# Altium PCB imx6_base_board_lcd7_r1.PcbDoc (part 3 of 6)
Units mil, origin at the board's own origin, x right, y up, seen from the top; angles counter-clockwise.
Board outline 7480.32 x 5118.11 mil, 4 copper layers (Top Layer, Internal Plane 1, Internal Plane 2, Bottom Layer), stack 30.635 mil thick; 518 components, 398 nets, 1886 pads, 1407 vias.
Unrouted connection lines stored in the file: 12.
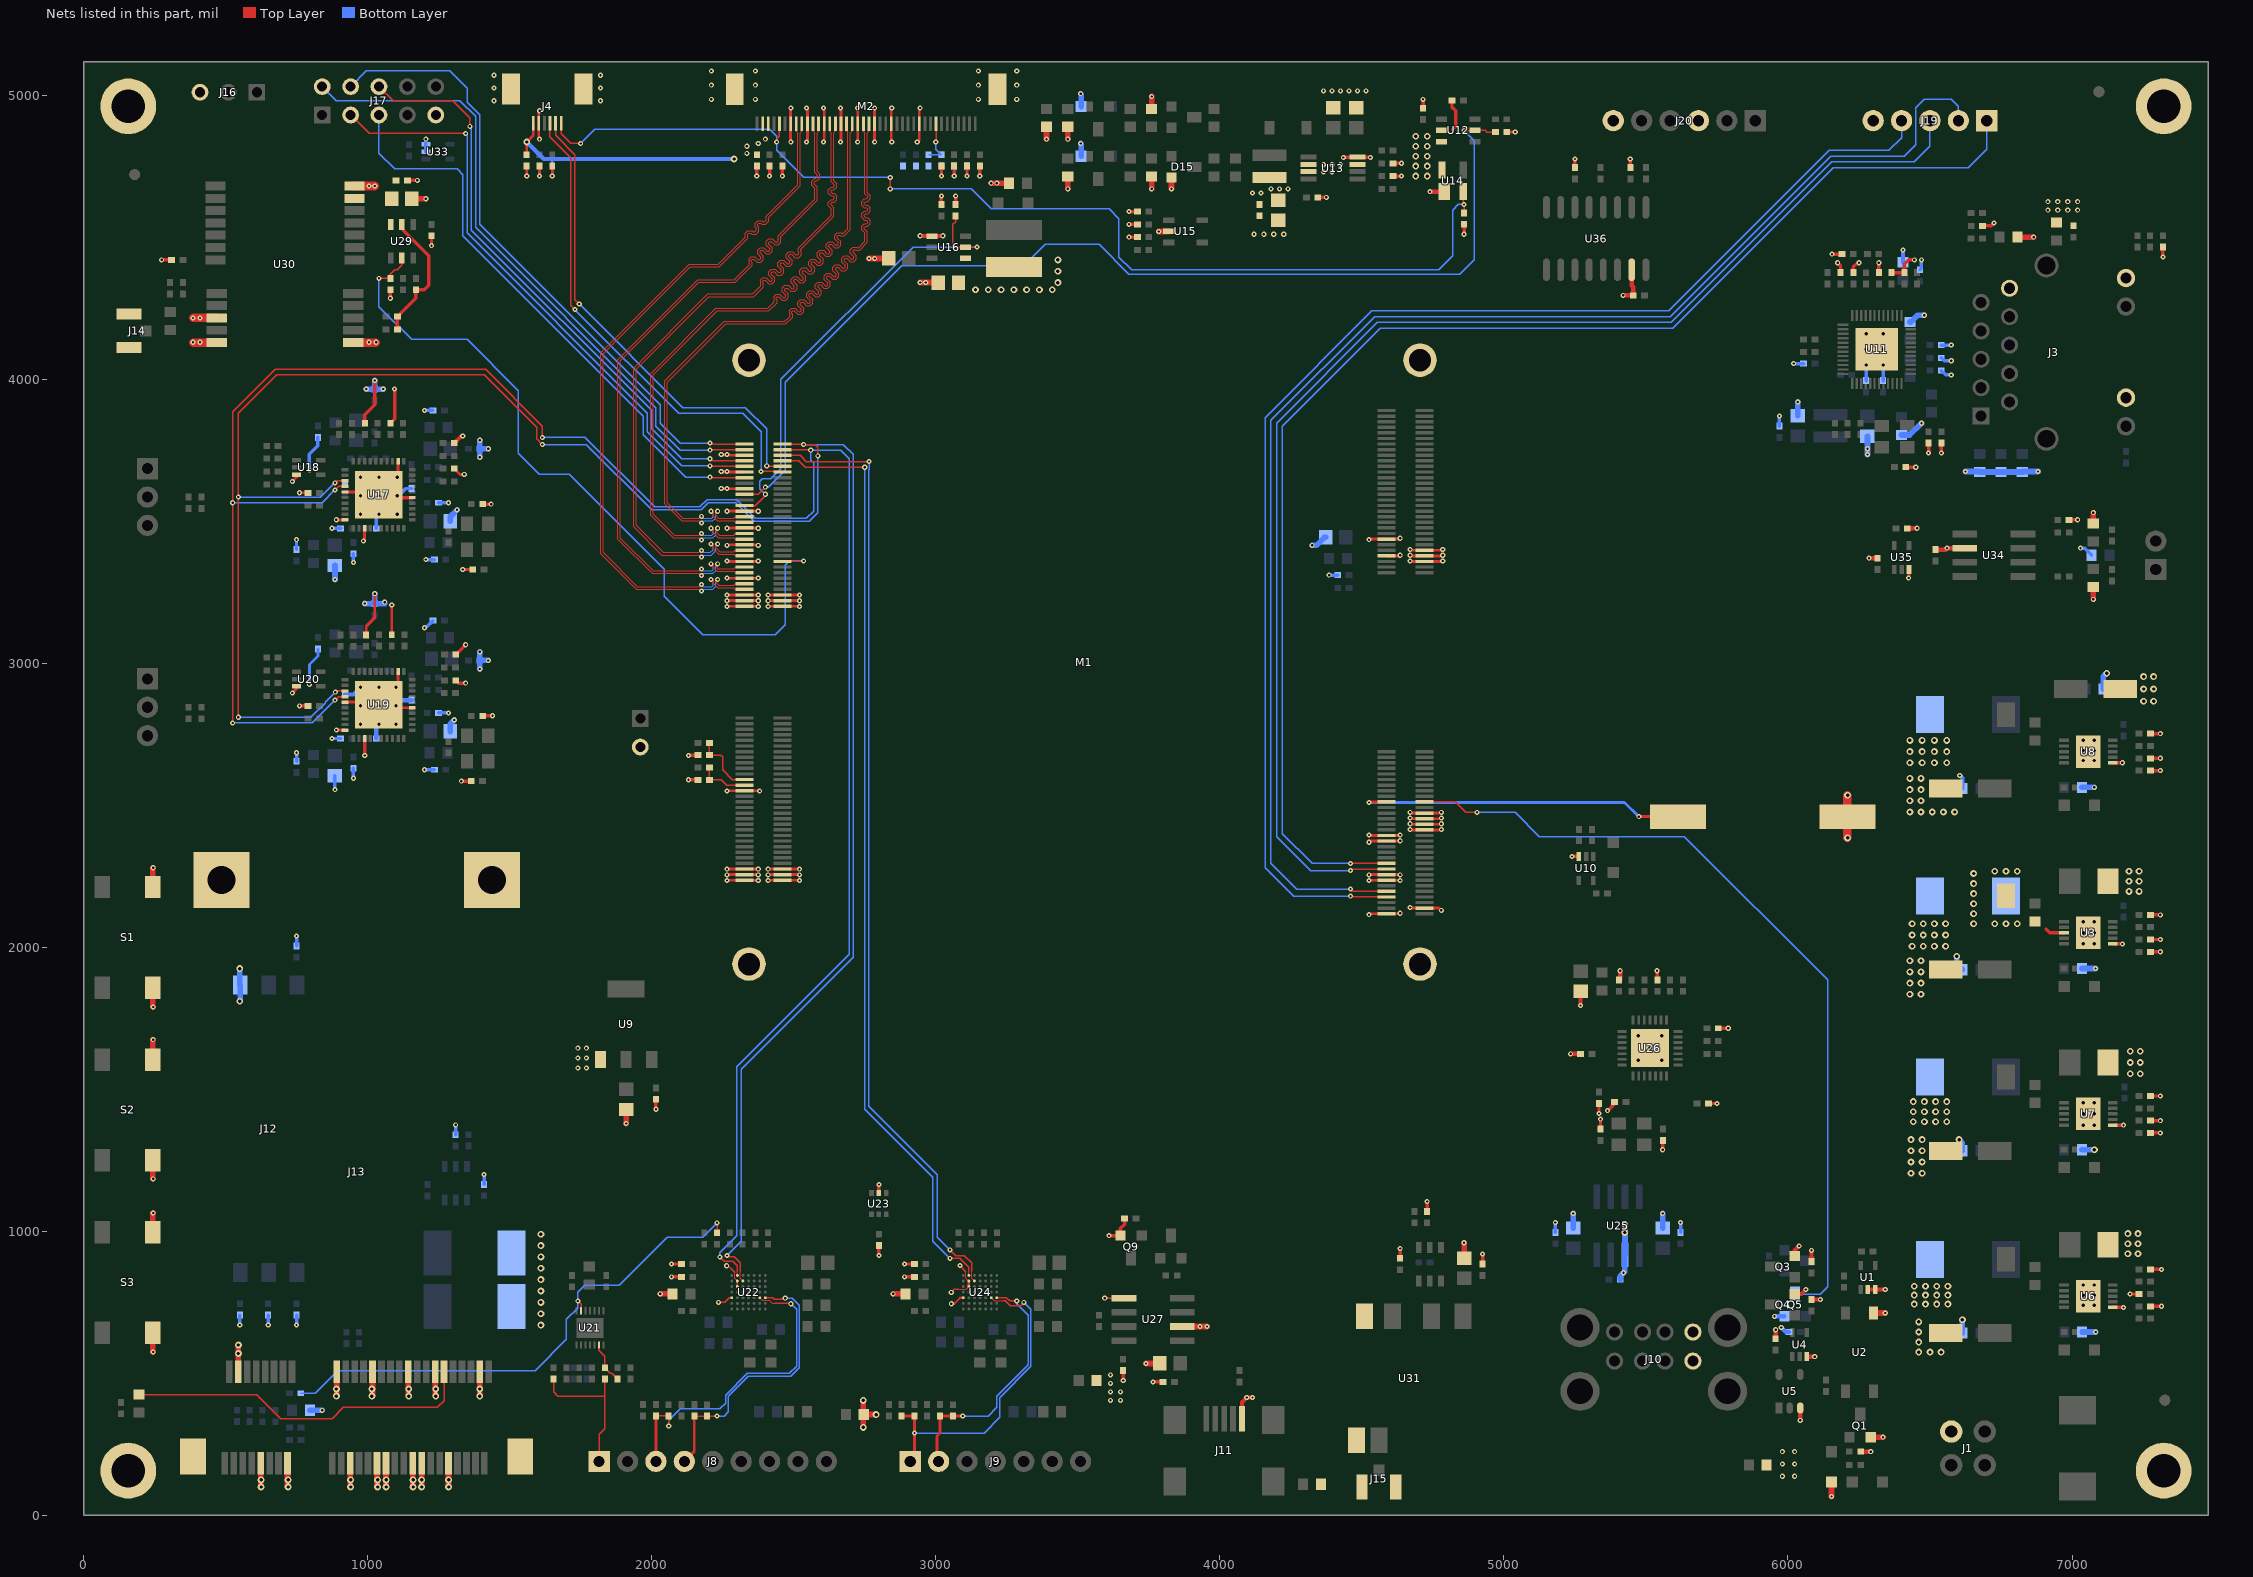
[diagram p5: the nets of this part, all layers, seen from the top]

## Via types
v1: diameter 18, hole 8, Top Layer to Bottom Layer, tented both sides, 875 vias
v2: diameter 24, hole 12, Top Layer to Bottom Layer, tented both sides, 532 vias

## Nets (pads, with @x,y where several pads share a name; then routed paths per layer and width w, separated by ;. In a path a pad name is that pad's centre, name@x,y a point inside that pad or via, vN(x,y) a via of type N, cw(c..) or ccw(c..) an arc to the next point about the centre after c; other vN are vias at no path point) (continued)
GND: BT1.2 C1.2 C2.2 C4.2 C5.2 C6.2 C7.2 C8.2 C10.2 C11.2 C12.2 C13.2 C14.2 C16.2 C17.2 C18.2 C20.2 C21.2 C22.2 C23.2 C24.2 C25.2 C26.2 C27.2 C28.2 C29.2 C30.2 C31.2 C32.2 C33.2 C34.2 C35.2 C36.2 C37.2 C38.2 C39.2 C40.2 C41.2 C42.2 C43.2 C44.1 C45.2 C46.2 C48.1 C49.2 C50.2 C51.2 C52.2 C55.2 C56.2 C57.2 C58.2 C59.2 C60.2 C61.2 C62.2 C63.2 C64.2 C65.2 C66.2 C67.2 C68.2 C69.2 C70.2 C71.2 C72.2 C77.2 C78.2 C79.2 C83.1 C85.1 C86.1 C87.2 C92.1 C93.1 C94.1 C95.1 C96.1 C97.1 C98.2 C99.2 C100.2 C101.2 C102.2 C107.2 C108.2 C109.2 C113.1 C115.1 C116.1 C117.2 C122.1 C123.1 C124.1 C125.1 C126.1 C127.1 C134.1 C138.1 C141.1 C147.2 C150.1 C154.1 C157.1 C162.1 C163.1 C164.1 C165.1 C166.1 C167.2 C168.2 C169.2 C170.2 C171.2 C172.2 C173.2 C174.1 C175.1 C176.2 C177.2 C179.2 C180.2 C181.2 C182.2 C183.2 C184.2 C186.2 C188.2 C189.2 C191.2 C192.2 C193.1 C194.2 C195.2 C196.2 C197.2 C198.2 C199.2 C201.2 C202.2 D3.1 D4.1 D7.1 D9.1 D11.1 D13.2 D15.2 D16.1 D17.2 J1.4 J2.2 J3.10 J3.12 J3.14 J4. J4.5 J10.4 J10.8 J11.5 J12.4 J13.0 J13.4 J13.9 J13.15 J13.18 J13.21 J13.26 J13.27 J13.29 J13.34 J13.35 J13.37 J13.40 J13.43 J13.50 J13.MT9 J13.MT10 J14.2 J14.3 J15.2 J15.3 J16.3 J17.9 J19.5 J20.3 J20.6 L19.1 L21.1 L23.1 L25.1 M1.A5 M1.A11 M1.A17 M1.A25 M1.A31 M1.A37 M1.A43 M1.A49 M1.A55 M1.A56 M1.A57 M1.A58 M1.A59 M1.A60 M1.B27 M1.B55 M1.B56 M1.B57 M1.B58 M1.B59 M1.B60 M1.C47 M1.C52 M1.C53 M1.C54 M1.C56 M1.D24 M1.D26 M1.D28 M1.D30 M1.D31 M1.D33 M1.D45 M1.D47 M1.D58 M1.D59 M1.MT5 M1.MT6 M1.MT7 M1.MT8 M2. M2.7 M2.10 M2.13 M2.16 M2.19 M2.22 M2.25 M2.30 pad.MT1 pad.MT2 pad.MT3 pad.MT4 Q1.3 Q3.3 Q4.3 Q5.3 Q9.3 R7.2 R9.2 R10.1 R12.2 R13.2 R14.2 R16.2 R19.2 R20.1 R24.2 R26.1 R29.2 R30.1 R43.2 R46.1 R51.1 R52.1 R53.1 R54.1 R55.1 R56.1 R57.1 R58.1 R62.1 R64.1 R69.2 R70.2 R71.2 R72.2 R74.1 R76.1 R78.1 R80.1 R83.1 R85.2 R86.1 R90.2 R98.2 R99.2 R103.2 R111.2 R112.2 R143.2 R150.1 R152.2 R154.1 R157.1 R159.1 R160.1 R172.1 R175.1 R177.1 R179.1 R180.1 R186.2 R188.2 R190.2 S1.1 S2.1 S3.1 U1.2 U1.3 U2.3 U3.6 U3.11 U4.3 U5.3 U6.6 U6.11 U7.6 U7.11 U8.6 U8.11 U9.1 U10.3 U11.49 U13.4 U14.1 U15.2 U16.4 U17. U17.3 U17.15 U17.22 U17.35 U17.40 U18.3 U19. U19.3 U19.15 U19.22 U19.35 U19.40 U20.3 U22.F2 U22.F3 U22.G5 U23.2 U24.F2 U24.F3 U24.G5 U25.6 U26.29 U27.1 U27.6 U30.10 U30.12 U30.13 U30.24 U31.4 U31.6 U33.2 U33.3 U34.2 U35.3 U36.15 | length 18322.1
  Top Layer w3: 2292,855 2292.07,854.93 2292.07,834.93 2294,833 2294,832.88 U22.F2@2301.57,825.31 ; 3080.79,795.78 3106.72,795.78 U24.F3@3116.57,805.63 ; 3106.38,858.62 3106.38,835.5 U24.F2@3116.57,825.31
  Top Layer w4.7: v1(2235,750) 2257,750 2273.25,766.25 U22.G5@2281.88,766.25 ; v1(2264,879) 2268,879 2283,864 2284,864 2292,856 2292,855 ; U22.F3@2301.57,805.63 U22.F2@2301.57,825.31 ; v1(3054.77,785.23) 3055.23,785.23 3065.79,795.78 3080.79,795.78 ; v1(3085,880) 3106.38,858.62 ; v1(3595,765) U27.1@3662.64,765
  Top Layer w8: v1(3055,745) 3065,745 3086.25,766.25 U24.G5@3096.88,766.25 ; U24.F3@3116.57,805.63 U24.F2@3116.57,825.31
  Top Layer w10: v1(735,2895) 750,2910 U20.3@750,2918.8 ; v1(735,3640) 750,3655 U18.3@750,3663.8 ; v1(760,3600) R90.2@790.13,3600 ; v1(890,2765) 890.47,2764.53 U19.40@920.47,2764.53 ; v1(890,3505) 890.47,3504.53 U17.40@920.47,3504.53 ; U19.35@920.47,2862.95 1028.74,2862.95 U19.@1038.58,2853.11 ; U17.35@920.47,3602.95 1028.74,3602.95 U17.@1038.58,3593.11 1107.48,3662.01 U17.22@1107.48,3711.22 ; v1(985,3430) 989.37,3434.37 U17.3@989.37,3475 ; C117.2@995,3099.87 995,3130 1025,3160 v1(1025,3245) ; C115.1@1085,3100.13 v1(1085,3205) ; U19.@1100.24,2914.76 U19.@1038.58,2853.11 ; U19.@1107.48,2922.01 U19.22@1107.48,2971.22 ; U19.15@1156.69,2844 U19.15@1156.69,2843.27 1048.43,2843.27 U19.@1038.58,2853.11 ; C86.1@1305.13,3685 1325.13,3665 v1(1340,3665) ; v1(1560,4715) C67.2@1560,4750.13 ; v1(1605,4715) R85.2@1605,4750.13 ; v1(1605,4845) 1602.6,4842.6 J4.5@1602.6,4900.28 1602.6,4942.6 v1(1605,4945) ; v1(2245,3615) 2245.83,3614.17 M1.A17@2326.77,3614.17 ; v1(2245,3675) 2246.77,3673.23 M1.A11@2326.77,3673.23 ; v1(2245,3735) 2247.72,3732.28 M1.A5@2326.77,3732.28 ; v1(2265,2235) 2266.22,2236.22 M1.B59@2326.77,2236.22 2373.78,2236.22 v1(2375,2235) ; v1(2265,2255) 2265.91,2255.91 M1.B57@2326.77,2255.91 2374.09,2255.91 v1(2375,2255) ; v1(2265,2275) 2265.59,2275.59 M1.B55@2326.77,2275.59 2374.41,2275.59 v1(2375,2275) ; v1(2265,2550) 2266.18,2551.18 M1.B27@2326.77,2551.18 2378.82,2551.18 v1(2380,2550) ; v1(2265,3200) 2265.79,3200.79 M1.A59@2326.77,3200.79 2374.21,3200.79 v1(2375,3200) ; v1(2265,3220) 2265.47,3220.47 M1.A57@2326.77,3220.47 2374.53,3220.47 v1(2375,3220) ; v1(2265,3240) 2265.16,3240.16 M1.A55@2326.77,3240.16 2374.84,3240.16 v1(2375,3240) ; v1(2265,3300) 2265.79,3299.21 M1.A49@2326.77,3299.21 2374.21,3299.21 v1(2375,3300) ; v1(2265,3360) 2266.73,3358.27 M1.A43@2326.77,3358.27 2373.27,3358.27 v1(2375,3360) ; v1(2265,3415) 2267.32,3417.32 M1.A37@2326.77,3417.32 2372.68,3417.32 v1(2375,3415) ; v1(2265,3475) 2266.38,3476.38 M1.A31@2326.77,3476.38 2373.62,3476.38 v1(2375,3475) ; v1(2265,3535) 2265.43,3535.43 M1.A25@2326.77,3535.43 2374.57,3535.43 v1(2375,3535) ; v1(2410,2235) 2411.22,2236.22 M1.B60@2460.63,2236.22 2518.78,2236.22 v1(2520,2235) ; v1(2410,2255) 2410.91,2255.91 M1.B58@2460.63,2255.91 2519.09,2255.91 v1(2520,2255) ; v1(2410,2275) 2410.59,2275.59 M1.B56@2460.63,2275.59 2519.41,2275.59 v1(2520,2275) ; v1(2410,3200) 2410.79,3200.79 M1.A60@2460.63,3200.79 2519.21,3200.79 v1(2520,3200) ; v1(2410,3220) 2410.47,3220.47 M1.A58@2460.63,3220.47 2519.53,3220.47 v1(2520,3220) ; v1(2410,3240) 2410.16,3240.16 M1.A56@2460.63,3240.16 2519.84,3240.16 v1(2520,3240) ; v1(2490,4835) 2489.25,4835.75 M2.7@2489.25,4899.37 2489.25,4954.25 v1(2490,4955) ; v1(2545,4835) 2548.31,4838.31 M2.10@2548.31,4899.37 2548.31,4951.69 v1(2545,4955) ; v1(2605,4835) 2607.36,4837.36 M2.13@2607.36,4899.37 2607.36,4952.64 v1(2605,4955) ; v1(2665,4835) 2666.42,4836.42 M2.16@2666.42,4899.37 2666.42,4953.58 v1(2665,4955) ; v1(2725,4835) 2725.47,4835.47 M2.19@2725.47,4899.37 2725.47,4954.53 v1(2725,4955) ; v1(2785,4835) 2784.53,4835.47 M2.22@2784.53,4899.37 2784.53,4954.53 v1(2785,4955) ; v1(2845,4835) 2843.58,4836.42 M2.25@2843.58,4899.37 2843.58,4953.58 v1(2845,4955) ; v1(2935,4835) 2942.01,4842.01 M2.30@2942.01,4899.37 2942.01,4952.01 v1(2945,4955) ; v1(4525,2115) 4528.11,2118.11 M1.D59@4586.61,2118.11 4633.11,2118.11 v1(4635,2120) ; v1(4525,2235) 4526.22,2236.22 M1.D47@4586.61,2236.22 4633.78,2236.22 v1(4635,2235) ; v1(4525,2255) 4525.91,2255.91 M1.D45@4586.61,2255.91 4634.09,2255.91 v1(4635,2255) ; v1(4525,2370) 4525,2373.03 4525.98,2374.02 M1.D33@4586.61,2374.02 4634.02,2374.02 v1(4635,2375) ; v1(4525,2395) 4526.3,2393.7 M1.D31@4586.61,2393.7 4633.7,2393.7 v1(4635,2395) ; v1(4525,3435) 4527.01,3437.01 M1.C47@4586.61,3437.01 4632.01,3437.01 v1(4635,3440) ; M1.C53@4586.61,3377.95 4632.95,3377.95 v1(4635,3380) ; v1(4670,2140) 4672.2,2137.8 M1.D58@4720.47,2137.8 4772.2,2137.8 v1(4780,2130) ; v1(4670,2415) 4671.61,2413.39 M1.D30@4720.47,2413.39 4778.39,2413.39 v1(4780,2415) ; v1(4670,2435) 4671.93,2433.07 M1.D28@4720.47,2433.07 4778.07,2433.07 v1(4780,2435) ; v1(4670,2455) 4672.24,2452.76 M1.D26@4720.47,2452.76 4777.76,2452.76 v1(4780,2455) ; v1(4670,2475) 4672.56,2472.44 M1.D24@4720.47,2472.44 4777.44,2472.44 v1(4780,2475) ; v1(4670,3360) 4671.73,3358.27 M1.C56@4720.47,3358.27 4783.27,3358.27 v1(4785,3360) ; v1(4670,3380) 4672.05,3377.95 M1.C54@4720.47,3377.95 4782.95,3377.95 v1(4785,3380) ; v1(4670,3400) 4672.36,3397.64 M1.C52@4720.47,3397.64 4782.64,3397.64 v1(4785,3400)
  Top Layer w12: v1(275,4420) R175.1@309.87,4420 ; v1(760,2850) R103.2@790.13,2850 ; U19.3@989.37,2735 989.37,2675.63 v1(990,2675) ; C87.2@990,3844.87 990,3875 1025,3910 v1(1025,3995) ; U17.@1048.43,3583.27 U17.15@1156.69,3583.27 ; C85.1@1080,3845.13 1095,3860.13 v1(1095,3965) ; v1(1080,4285) R177.1@1080,4314.87 ; C189.2@1139.87,4700 v1(1175,4700) ; v1(1225,4470) R172.1@1225,4504.87 ; C116.1@1310.13,2940 1320.13,2930 v1(1345,2930) ; C113.1@1310.13,3030 1345,3064.87 v1(1345,3065) ; v1(1330,2585) C126.1@1364.87,2585 ; v1(1335,3330) C97.1@1369.87,3330 ; C127.1@1405.13,2815 v1(1440,2815) ; C96.1@1405.13,3560 v1(1435,3560) ; v1(2015,1430) C27.2@2015,1465.13 ; v1(2070,840) C134.1@2104.87,840 ; v1(2070,885) C138.1@2104.87,885 ; v1(2130,2590) 2130.31,2589.69 R190.2@2163.29,2589.69 ; v1(2130,2675) 2131.3,2676.3 R188.2@2163.04,2676.3 ; v1(2370,4715) C65.2@2370,4750.13 ; v1(2460,4715) R74.1@2460,4749.87 ; U23.2@2799.4,1135 2799.4,1164.4 v1(2800,1165) ; v1(2800,915) C147.2@2800,950.13 ; v1(2890,840) C150.1@2924.87,840 ; v1(2890,885) C154.1@2924.87,885 ; C66.2@3020,4614.87 v1(3020,4645) ; v1(3065,4715) R83.1@3065,4749.87 ; R71.2@3070,4614.87 v1(3070,4645) ; v1(3155,4715) R86.1@3155,4749.87 ; v1(3610,985) Q9.3@3650,985 3650,1010 3664.87,1024.87 R154.1@3664.87,1045 ; v1(3660,475) R157.1@3660,509.87 ; v1(3680,4500) R70.2@3710.13,4500 ; v1(3680,4545) C62.2@3710.13,4545 ; v1(3680,4590) C61.2@3710.13,4590 ; v1(3765,470) C177.2@3800.13,470 ; C60.2@4344.87,4640 v1(4375,4640) ; v1(4435,4780) 4436.77,4781.77 U13.4@4485,4781.77 v1@4526.77,4781.77 ; C59.2@4609.87,4715 v1(4640,4715) ; R69.2@4609.87,4760 v1(4640,4760) ; R179.1@4635,905.13 v1(4635,940) ; v1(4715,4985) 4715.55,4984.45 R62.1@4715.55,4953.59 ; R180.1@4730,1070.13 v1(4730,1105) ; C191.2@4925,884.87 v1(4925,920) ; R64.1@5010.13,4870 v1(5040,4870) ; v1(5240,2320) U10.3@5263.8,2320 ; C202.2@5250,4744.87 v1(5250,4775) ; C175.1@5334.65,1358.71 5340,1364.06 v1(5340,1395) ; R152.2@5334.65,1452.57 5335,1452.21 v1(5335,1415) ; v1(5365,1425) 5365.94,1425 5389.32,1448.38 C165.1@5389.32,1452.76 ; C201.2@5445,4744.87 v1(5445,4775) ; R150.1@5539.37,1886.27 v1(5539.37,1917.32) ; v1(5559.06,1287.4) C174.1@5559.06,1318.46 ; C166.1@5716.98,1452.76 5719.73,1450 v1(5750,1450) ; C170.2@5756.09,1716.54 5757.63,1715 v1(5790,1715) ; v1(6155,4440) 6188.42,4440 R56.1@6190.46,4437.95 ; v1(6175,4410) 6185,4400 R55.1@6185,4375.13 ; R51.1@6230,4375.13 6230,4395 6245,4410 v1(6250,4410) ; R52.1@6320,4375.13 v1(6320,4410) ; R53.1@6365,4375.13 R54.1@6410,4375.13 6410,4405 6425,4420 v1(6445,4420) ; C45.2@6414.87,3690 v1(6450,3690) ; v1(6425,3300) 6426.2,3301.2 U35.3@6426.2,3330 ; v1(6495,3740) C46.2@6495,3775.13 ; v1(6540,3740) R46.1@6540,3774.87 ; R57.1@6685.13,4540 6715,4540 v1(6725,4550) ; R186.2@6989.87,3505 v1(7020,3505) ; U6.6@7143.34,732.28 v1(7181.1,732.28) ; U3.6@7143.34,2011.81 v1(7177.17,2011.81) ; U8.6@7143.34,2649.61 v1(7177.17,2649.61) ; U7.6@7148,1374.02 v1(7181.1,1374.02) ; v1(7204.72,779.53) C11.2@7236.03,779.53 ; R19.2@7275.78,866.14 v1(7314.96,866.14) ; C20.2@7275.78,1389.76 v1(7311.02,1389.76) ; R24.2@7275.78,1476.38 v1(7311.02,1476.38) ; C23.2@7275.78,2665.35 v1(7311.02,2665.35) ; R29.2@7275.78,2751.97 v1(7311.02,2751.97) ; C5.2@7275.97,2027.56 v1(7311.02,2027.56) ; R9.2@7275.97,2114.17 v1(7311.02,2114.17) ; R20.1@7276.03,736.22 v1(7314.96,736.22) ; R26.1@7276.03,1346.46 v1(7311.02,1346.46) ; R30.1@7276.03,2622.05 v1(7311.02,2622.05) ; R10.1@7276.22,1984.25 v1(7311.02,1984.25) ; v1(7320,4430) R58.1@7320,4464.87
  Top Layer w15: C83.1@1305.13,3775 1330.13,3800 v1(1335,3800) ; v1(2945,4505) 2946.26,4503.74 U16.4@2986.89,4503.74 3023.74,4503.74 v1(3025,4505) ; J11.5@4077.99,340 4077.99,397.99 v1(4095,415) v1(4115,415) ; v1(4740,4660) U14.1@4790,4660 ; v1(5235,1625) C164.1@5269.87,1625 ; C164.1@5269.87,1625.98 C164.1@5271.21,1625.98 ; v1(5270,1795) 5270,1836.93 C162.1@5275.59,1842.52 ; C163.1@5409.45,1886.27 v1(5409.45,1917.32) ; v1(5420,4295) C199.2@5455.13,4295 5455,4295.13 5455,4325 5450,4330 U36.15@5450,4385 ; R12.2@5956.69,622.24 v1(5956.69,653.54) ; Q4.3@6023.62,779.72 6047.44,779.72 v1(6062.99,795.28) ; Q3.3@6023.62,913.58 6023.62,933.07 v1(6039.37,948.82) ; v1(6043.31,334.65) U5.3@6043.31,377.95 ; U4.3@6066.94,559.06 v1(6094.49,559.06) ; R13.2@6082.68,760.03 6113.98,760.03 v1(6114.17,759.84) ; R14.2@6082.68,893.89 v1(6082.68,933.07) ; R7.2@6256.09,224.41 v1(6291.34,224.41) ; U1.2@6281.5,795.28 U1.3@6307.1,795.28 v1(6342.52,795.28) ; v1(6285,3370) 6285.13,3369.87 C195.2@6315,3369.87 ; C196.2@6419.87,3475 v1(6455,3475) ; C194.2@6520,3399.87 6554.87,3399.87 v1(6560,3405) U34.2@6622.64,3405
  Top Layer w20: S3.1@243.58,642.83 243.58,576.42 v1(245,575) ; S3.1@243.58,997.17 243.58,1063.58 v1(245,1065) ; S2.1@243.58,1250.33 243.58,1186.42 v1(245,1185) ; S2.1@243.58,1604.67 243.58,1673.58 v1(245,1675) ; S1.1@243.58,1857.83 243.58,1791.42 v1(245,1790) ; S1.1@243.58,2212.17 243.58,2278.58 v1(245,2280) ; v1(385,4130) v1@386.18,4128.82 ; v1(385,4215) v1@385.43,4215.43 ; J13.4@543.62,506.81 545,508.19 v2(545,600) ; J13.9@623.54,183.58 623.54,101.46 v2(625,100) ; J13.15@718.03,183.58 718.03,101.97 v2(720,100) ; v2@890,425 891.26,426.26 J13.18@891.26,506.42 ; J13.21@938.5,183.58 938.5,101.5 v2(940,100) ; v2@1017.24,422.24 J13.26@1017.24,506.42 ; J13.27@1032.99,183.58 1032.99,102.01 v2(1035,100) ; J13.29@1064.49,183.58 1064.49,100.51 v2(1065,100) ; v2@1143.23,423.23 J13.34@1143.23,506.42 ; C188.2@1155.87,4635 v1(1205,4635) ; J13.35@1158.98,183.58 1158.98,101.02 v2(1160,100) ; v2(1190,100) 1190.47,100.47 J13.37@1190.47,183.58 ; J13.40@1237.72,506.42 1237.72,422.28 v2(1240,420) ; J13.43@1284.96,183.58 1284.96,100.04 v2(1285,100) ; v2(1395,420) 1395.2,420.2 J13.50@1395.2,506.42 ; v1(1910,1380) C26.2@1910,1429.13 ; v1(2030,780) C141.1@2073.5,780 ; v2(2745,310) v2(2745,405) ; L19.1@2746.5,355 v2(2790,355) ; v1(2765,4425) R72.2@2834.13,4425 ; v1(2850,780) C157.1@2893.5,780 ; v1(2945,4340) C63.2@3009.13,4340 ; v1(3195,4690) C64.2@3253.5,4690 ; v1(3390,4845) C50.2@3390,4888.5 ; v1(3465,4670) C48.1@3465,4713.5 ; v1(3465,4845) C51.2@3465,4888.5 ; v1(3740,535) C176.2@3789.13,535 ; v1(3760,4670) C52.2@3760,4713.5 ; C49.2@3760,4951.5 v1(3760,4995) ; v1(3785,4520) 3819.37,4520 U15.2@3820,4520.63 ; v1(3830,4670) D15.2@3830,4710 ; U27.6@3867.36,665 v1(3955,665) ; C192.2@4860,905.87 v1(4860,960) ; v1(6153.54,66.93) D4.1@6153.54,118.11 ; Q1.3@6291.54,275.59 v1(6334.65,275.59) ; U2.3@6301.97,712.6 v1(6342.52,712.6) ; D13.2@6807.99,4500 v1(6865,4500) ; v1(7075,3225) C197.2@7075,3268.5 ; C193.1@7075,3491.5 v1(7075,3530)
  Top Layer w30: v1@385.43,4215.43 U30.10@468.94,4215.43 ; v1@386.18,4128.82 U30.12@468.94,4128.82 ; U30.13@949.25,4128.82 v1@1028.82,4128.82 ; U30.24@953.19,4680 v1(1025,4680) ; v2@6209.37,2385.63 BT1.2@6209.37,2460 v2@6209.37,2534.37
  Bottom Layer w10: C68.2@750,3399.87 v1(750,3435) ; v1(795,2925) 795,2995 825,3025 C108.2@825,3050.13
  Bottom Layer w12: v1(550,670) C181.2@550,705.13 ; v1(650,670) C182.2@650,705.13 ; v1(750,670) C180.2@750,705.13 ; C179.2@750,2004.87 v1(750,2040) ; C98.2@750,2654.87 v1(750,2685) ; v1(795,3680) 795,3735 825,3765 C78.2@825,3795.13 ; v1(875,2735) C125.1@904.87,2735 ; v1(875,3475) C95.1@904.87,3475 ; v1(885,2555) C100.2@885,2604.13 ; v1(950,2595) C99.2@950,2630.13 ; v1(950,3355) C69.2@950,3385.13 ; C94.1@1030.13,3475 1030.13,3515.13 v2(1040,3525) ; v2(1105,3590) 1109.87,3590 1135,3615.13 C92.1@1155,3615.13 ; v1(1200,2625) C109.2@1235.13,2625 ; v1(1200,3125) 1205.13,3125 C107.2@1230.13,3150 ; v1(1200,3890) C77.2@1230.13,3890 ; v1(1205,3365) C70.2@1235.13,3365 ; U33.2@1205,4800.6 U33.3@1205,4826.2 v1(1205,4845) ; C101.2@1249.87,2825 v1(1285,2825) ; C71.2@1249.87,3565 v1(1285,3565) ; R160.1@1310,1340.13 v1(1310,1375) ; R159.1@1410,1165.13 v1(1410,1200) ; v1(4385,3310) R143.2@4415.13,3310 ; C169.2@5181.1,996.25 v1(5181.1,1031.5) ; C172.2@5622.05,996.25 v1(5622.05,1031.5) ; C34.2@5970,3834.87 v1(5970,3870) ; v1(6020,4055) C40.2@6055.13,4055 ; C36.2@6275,3994.87 v2(6275,4050) ; C37.2@6335,3994.87 v2(6335,4050) ; C29.2@6465,4384.87 6470,4389.87 v1(6470,4420) ; C38.2@6539.87,4030 6554.87,4015 v1(6575,4015) ; C32.2@6539.87,4075 6549.87,4065 v1(6575,4065) ; C39.2@6539.87,4120 v1(6575,4120) ; v1(7030,3405) 7045,3405 7068.5,3381.5 C198.2@7068.5,3380
  Bottom Layer w15: C123.1@920,2890.13 950.13,2890.13 v2(975,2915) ; C124.1@1030.13,2735 1030.13,2775.13 v2(1040,2785) ; v2(1100,2850) 1120.13,2870.13 C122.1@1155,2870.13 ; v1(5952.76,700.79) Q5.3@5987.99,700.79 ; v1(5976.38,661.42) 5992.13,645.67 R16.2@6003.75,645.67 ; C28.2@6405,4411.5 v1(6405,4455) ; v1(6605,2605) 6614.17,2595.83 C17.2@6614.17,2559.06
  Bottom Layer w20: v2(550,1810) 551.46,1811.46 J12.4@551.46,1866.81 550,1868.27 v2(550,1925) ; C186.2@796.5,370.13 839.87,370.13 v1(840,370) ; v1(885,3295) C79.2@885,3344.13 ; v1(990,3210) 990.13,3209.87 R111.2@1025,3209.87 ; v1(995,3965) 995.13,3964.87 R98.2@1025,3964.87 ; v1(1025,3245) R111.2@1025,3209.87 ; v1(1025,3995) R98.2@1025,3964.87 ; v1(1055,3965) 1054.87,3964.87 R98.2@1025,3964.87 ; v1(1060,3215) 1060,3210 1059.87,3209.87 R111.2@1025,3209.87 ; C102.2@1290.87,2760 1290.87,2785.87 v1(1305,2800) ; C72.2@1290.87,3500 1290.87,3515.87 v1(1315,3540) ; v1(1395,2980) 1394.87,2980.13 R112.2@1394.87,3010 ; v1(1395,3040) 1394.87,3039.87 R112.2@1394.87,3010 ; v1(1395,3725) 1394.87,3725.13 R99.2@1394.87,3755 ; v1(1395,3785) 1395,3755.13 R99.2@1394.87,3755 ; v1(1425,3010) R112.2@1394.87,3010 ; v1(1425,3755) R99.2@1394.87,3755 ; v1(3510,4830) 3511.85,4828.15 D16.1@3511.85,4785 ; v1(3510,5005) 3511.85,5003.15 D17.2@3511.85,4960 ; v1(4325,3415) 4340,3415 4368.19,3443.19 C171.2@4372.52,3443.19 ; C168.2@5244.09,1011.81 v1(5244.09,1062.99) ; C167.2@5409.64,830.71 5409.64,842.71 5425.2,858.27 5425.2,915.95 U25.6@5426.57,917.32 5426.57,1022.24 v2(5425.2,1023.62) ; C173.2@5559.06,1011.81 v1(5559.06,1062.99) ; C33.2@6035,3870.87 v1(6035,3920) ; v1(6280,3735) C35.2@6280,3799.13 ; C30.2@6400,3803.5 6428.5,3803.5 v1(6470,3845) ; C31.2@6430,4201.5 6431.5,4200 6456.5,4225 v1(6480,4225) ; v2(6594.49,1968.5) 6594.49,1940.94 C1.2@6614.17,1921.26 ; v2(6602.36,1322.83) 6614.17,1311.02 C13.2@6614.17,1283.46 ; C7.2@6614.17,641.73 v2(6614.17,688.98) ; v1(6625,3675) 6673.5,3675 C41.2@6675,3673.5 C42.2@6750,3673.5 C43.2@6825,3673.5 6826.5,3675 v1(6880,3675) ; C16.2@7035.43,1287.4 v2(7078.74,1287.4) ; C4.2@7035.43,1925.2 v1(7082.68,1925.2) ; C22.2@7035.43,2562.99 v1(7078.74,2562.99) ; C10.2@7035.87,645.67 v1(7083.12,645.67) ; C25.2@7110.24,2909.45 7110.24,2952.76 v2(7122.05,2964.57)
  other v1: 5980.32,137.8 6023.62,137.8 5980.32,181.1 6023.62,181.1 5980.32,224.41 6023.62,224.41 3615,405 3650,405 3615,435 3650,435 3615,465 3615,495 3930,665 5421.26,854.33 1740,1575 1770,1575 1740,1610 1770,1610 1740,1645 1770,1645 2265,3615 2265,3675 2265,3735 6280,3755 410,4130 1005,4130 1030,4130 410,4215 2965,4340 2785,4425 4120,4510 4155,4510 4190,4510 4225,4510 6915,4595 6950,4595 6985,4595 7020,4595 6915,4625 6950,4625 6985,4625 7020,4625 1005,4680 3215,4690 4530,4780 1445,4980 1820,4980 2210,4985 2365,4985 3150,4985 3285,4985 4365,5015 4395,5015 4425,5015 4455,5015 4485,5015 4515,5015 1445,5025 1820,5025 2210,5035 2365,5035 3150,5035 3285,5035 1445,5070 1820,5070 2210,5085 2365,5085 3150,5085 3285,5085
  other v2: 625,125 720,125 940,125 1035,125 1065,125 1160,125 1190,125 1285,125 890,420 1015,420 1145,420 890,445 1015,445 1145,445 1240,445 1395,445 545,570 6460.63,574.8 6500,574.8 6539.37,574.8 6460.63,610.24 6460.63,645.67 1610,670 6460.63,681.1 1610,710 7039.37,740.16 7078.74,740.16 6444.88,744.09 6484.25,744.09 6523.62,744.09 6562.99,744.09 1610,750 6444.88,775.59 6484.25,775.59 6523.62,775.59 6562.99,775.59 7039.37,775.59 7078.74,775.59 1610,790 6444.88,807.09 6484.25,807.09 6523.62,807.09 6562.99,807.09 7039.37,811.02 7078.74,811.02 1610,830 1610,870 1610,910 7196.85,921.26 7232.28,921.26 1610,950 7196.85,956.69 7232.28,956.69 1610,990 7196.85,992.13 7232.28,992.13 5425.2,996.06 6433.07,1204.72 6472.44,1204.72 6433.07,1244.09 6472.44,1244.09 6433.07,1283.46 6472.44,1283.46 6433.07,1322.83 6472.44,1322.83 7039.37,1374.02 7078.74,1374.02 6440.94,1385.83 6480.32,1385.83 6519.68,1385.83 6559.06,1385.83 7039.37,1413.39 7078.74,1413.39 6440.94,1421.26 6480.32,1421.26 6519.68,1421.26 6559.06,1421.26 7039.37,1452.76 7078.74,1452.76 6440.94,1456.69 6480.32,1456.69 6519.68,1456.69 6559.06,1456.69 7204.72,1555.12 7240.16,1555.12 7204.72,1594.49 7240.16,1594.49 5472.44,1602.36 5555.12,1602.36 7204.72,1633.86 7240.16,1633.86 5515.75,1645.67 5472.44,1688.98 5555.12,1688.98 6429.13,1834.65 6468.5,1834.65 6429.13,1874.02 6468.5,1874.02 6429.13,1913.39 6468.5,1913.39 6429.13,1952.76 6468.5,1952.76 6437.01,2003.94 6476.38,2003.94 6515.75,2003.94 6555.12,2003.94 7039.37,2011.81 7078.74,2011.81 6437.01,2043.31 6476.38,2043.31 6515.75,2043.31 6555.12,2043.31 7039.37,2051.18 7078.74,2051.18 6437.01,2082.68 6476.38,2082.68 6515.75,2082.68 6555.12,2082.68 7039.37,2090.55 7078.74,2090.55 7200.79,2196.85 7236.22,2196.85 7200.79,2232.28 7236.22,2232.28 7200.79,2267.72 7236.22,2267.72 6210,2385 6429.13,2476.38 6468.5,2476.38 6507.87,2476.38 6547.24,2476.38 6586.61,2476.38 6429.13,2515.75 6468.5,2515.75 6210,2535 6429.13,2555.12 6468.5,2555.12 6429.13,2594.49 6468.5,2594.49 6429.13,2649.61 6472.44,2649.61 6515.75,2649.61 6559.06,2649.61 7039.37,2657.48 7078.74,2657.48 6429.13,2688.98 6472.44,2688.98 6515.75,2688.98 6559.06,2688.98 7039.37,2692.91 7078.74,2692.91 6429.13,2728.35 6472.44,2728.35 6515.75,2728.35 6559.06,2728.35 7039.37,2728.35 7078.74,2728.35 975,2785 1100,2785 975,2850 1040,2850 7251.97,2866.14 7287.4,2866.14 7251.97,2909.45 7287.4,2909.45 1040,2915 1100,2915 7251.97,2952.76 7287.4,2952.76 975,3525 1105,3525 975,3590 1040,3590 975,3655 1040,3655 1105,3655 6275,4105 6335,4105 6275,4160 6335,4160
GPS-PWR: C187.1 C188.1 C189.1 R171.2 R173.2 U29.2 U29.3 U30.23 | length 450.4
  Top Layer w12: R171.2@1104.87,4175 R173.2@1104.87,4220 1170,4285.13 C187.1@1170,4314.87 1199.87,4314.87 1215,4330 1215,4435 1125,4525
GPS-PWREN: M1.A44 R177.2 U29.5 | length 2698.5
  Top Layer w4.7: v1(1040,4355) 1040.13,4354.87 R177.2@1080,4354.87 1080,4370 1095,4385 1105,4385 1120.63,4400.63 U29.5@1120.63,4426.89 ; M1.A44@2460.63,3358.27 2533.27,3358.27 v1(2535,3360)
  Bottom Layer w4.7: v1(1040,4355) 1040,4255 1155,4140 1350,4140 1530,3960 1530,3740 1605,3665 1710,3665 2045,3330 2045,3235 2180,3100 2435,3100 2470,3135 2470,3345 2485,3360 v1(2535,3360)
HP-DET: M1.B23 R187.1 R188.1 | length 229
  Top Layer w4.7: R187.1@2203.29,2719.61 2203.29,2676.55 R188.1@2203.04,2676.3 2243.7,2676.3 2250,2670 2250,2625 2284.45,2590.55 M1.B23@2326.77,2590.55
HPOUTL1: C137.2 J8.3 R120.1 U22.B5 | length 1152.4
  Top Layer w3: U22.B5@2380.31,766.25 2389.56,757 2395.82,757 2396.07,756.75 2414.25,756.75 2424,747 2432,747
  Top Layer w4.7: C137.2@2015,350.13 2059.75,350.13 R120.1@2060,349.87 v1(2060,315) ; 2432,747 2488,747 v1(2490,745)
  Top Layer w10: J8.3@2015,190 C137.2@2015,350.13
  Bottom Layer w4.7: v1(2060,315) 2060,335 2100,375 2240,375 2260,395 2260,423.72 2335.98,499.7 2484.7,499.7 2510,525 2510,725 v1(2490,745)
HPOUTL2: C153.2 J9.1 R131.1 U24.B5 | length 1127.5
  Top Layer w3: U24.B5@3195.31,766.25 3205.49,756.07 3233.93,756.07
  Top Layer w4.7: C153.2@2880,350.13 C153.2@2880.08,350.2 ; J9.1@2909.45,188.98 J9.1@2925,204.53 ; R131.1@2925,350.01 R131.1@2925.2,350.2 ; 3233.93,756.07 3245.21,756.07 3262.63,738.65 3298.65,738.65 v1(3310,750)
  Top Layer w10: C153.2@2880.08,350.2 R131.1@2925.2,350.2 ; J9.1@2925,204.53 2925,305 R131.1@2925,350.01
  Bottom Layer w4.7: v1(2925,290) 3170,290 3225,345 3225,415 3335,525 3335,725 v1(3310,750)
HPOUTR1: C136.2 J8.4 R123.1 U22.A5 | length 1008.6
  Top Layer w4.7: C136.2@2150,350.13 2150.13,350 v1(2230,350) ; U22.A5@2400,766.25 2426.75,766.25 2432,761 2461,761 2470,770 v1(2470,765)
  Top Layer w10: J8.4@2115,190 2150,225 C136.2@2150,350.13
  Bottom Layer w4.7: v1(2230,350) 2255,350 2270,365 2270,420 2340,490 2490,490 2520,520 2520,740 2495,765 v1(2470,765)
HPOUTR2: C152.2 J9.2 R133.1 U24.A5 | length 891.5
  Top Layer w4.7: J9.2@3005,193.43 J9.2@3009.45,188.98 ; C152.2@3015,350.13 C152.2@3015.13,350 ; U24.A5@3215,766.25 3215,766.05 3248.95,766.05 3260,755 v1(3285,755)
  Top Layer w10: J9.2@3005,193.43 3005,280 3015,290 C152.2@3015,350.13 ; C152.2@3015.13,350 v1(3095,350)
  Bottom Layer w4.7: v1(3095,350) 3185,350 3215,380 3215,420 3325,530 3325,705 3285,745 v1(3285,755)
I2C1-SCL: M1.A4 U17.34 U19.34 U22.F1 | length 7906.6
  Top Layer w3: U22.F1@2301.57,845 2301.57,858.43
  Top Layer w4.7: v1(525,2790) v1(525,3565) 525,3885 675,4035 1415,4035 1615,3835 v1(1615,3795) ; v1(885,2870) 897.64,2882.64 U19.34@920.47,2882.64 ; v1(885,3610) 897.64,3622.64 U17.34@920.47,3622.64 ; v1(2240,910) 2255,895 2285,895 2301.57,878.43 2301.57,858.43 ; M1.A4@2460.63,3751.97 2563.03,3751.97 2561.07,3750 v1(2560,3750)
  Bottom Layer w4.7: v1(525,2790) 805,2790 v1(885,2870) ; v1(525,3565) 840,3565 v1(885,3610) ; v1(1615,3795) 1765,3795 2010,3550 2170,3550 2195,3575 2300,3575 2365,3510 2545,3510 2570,3535 2570,3705 2560,3715 v1(2560,3750) 2665,3750 2695,3720 2695,1975 2300,1580 2300,985 2240,925 v1(2240,910)
I2C1-SDA: M1.A2 U17.33 U19.33 U22.E2 | length 7931.2
  Top Layer w3: 2311.07,858.93 2311.07,835.49 U22.E2@2321.25,825.31 ; v1@2533.35,3771.65 v1(2535,3770)
  Top Layer w4.7: v1(545,2810) v1(545,3585) 545,3880 680,4015 1410,4015 1595,3830 1595,3790 v1(1615,3770) ; v1@885,2895 892.32,2902.32 U19.33@920.47,2902.32 ; v1(885,3635) 892.32,3642.32 U17.33@920.47,3642.32 ; v1(2265,915) 2270,910 2290,910 2311.07,888.93 2311.07,858.93 ; M1.A2@2460.63,3771.65 v1@2533.35,3771.65 ; v1(2535,3770) 2575,3770 2585,3760 v1(2585,3730)
  Bottom Layer w4.7: v1(545,2810) 800,2810 850,2860 850,2861.88 v1(886.26,2898.14) ; v1(545,3585) 546.35,3583.65 833.65,3583.65 v1(885,3635) ; v1(1615,3770) 1770,3770 2000,3540 2175,3540 2200,3565 2296.28,3565 2361.28,3500 2555,3500 2585,3530 v1(2585,3730) ; v1(2265,915) 2315,965 2315,1570 2710,1965 2710,3735 2675,3770 v1(2535,3770)
I2C2-SCL: J4.3 M1.A12 | length 1741.2
  Top Layer w4.7: J4.3@1641.97,4900.28 1641.97,4853.03 1715,4780 1715,4260 v1(1730,4245) ; v1(2385,3675) 2458.86,3675 M1.A12@2460.63,3673.23
  Bottom Layer w4.7: v1(1730,4245) 2095,3880 2320,3880 2385,3815 v1(2385,3675)
I2C2-SDA: J4.2 M1.A10 | length 1698.5
  Top Layer w4.7: J4.2@1661.65,4900.28 1661.65,4858.35 1730,4790 1730,4280 v1(1745,4265) ; v1(2405,3695) 2407.09,3692.91 M1.A10@2460.63,3692.91
  Bottom Layer w4.7: v1(1745,4265) 2110,3900 2330,3900 2405,3825 v1(2405,3695)
I2C3-SCL: M1.A8 U24.F1 | length 3316
  Top Layer w3: U24.F1@3116.57,845 3116.57,860
  Top Layer w4.7: M1.A8@2460.63,3712.6 2517.4,3712.6 2540,3690 v1(2750,3690) ; v1(3050,905) 3085,905 3116.37,873.63 3116.37,860
  Bottom Layer w4.7: v1(2750,3690) 2750,1430 2990,1190 2990,965 v1(3050,905)
I2C3-SDA: M1.A6 U24.E2 | length 3370.8
  Top Layer w3: 3126.07,860 3126.07,835.49 U24.E2@3136.25,825.31
  Top Layer w4.7: M1.A6@2460.63,3732.28 2522.72,3732.28 2545,3710 v1(2765,3710) ; v1(3050,935) 3070,915 3100,915 3126.07,888.93 3126.07,860
  Bottom Layer w4.7: v1(2765,3710) 2766.35,3708.65 2766.35,3683.23 2765,3681.88 2765,1440 3005,1200 3005,980 v1(3050,935)
IO1: J19.1 M1.D41 | length 4829.1
  Top Layer w4.7: v1(4460,2295) 4460.28,2295.28 M1.D41@4586.61,2295.28
  Bottom Layer w4.7: v1(4460,2295) 4325,2295 4220,2400 4220,3835 4565,4180 5595,4180 6160,4745 6635,4745 6700,4810 J19.1@6700,4910
IO2: J19.2 M1.D51 | length 5031.8
  Top Layer w4.7: v1(4460,2205) 4468.15,2196.85 M1.D51@4586.61,2196.85
  Bottom Layer w4.7: v1(4460,2205) 4270,2205 4180,2295 4180,3855 4545,4220 5585,4220 6150,4785 6410,4785 6450,4825 6450,4955 6480,4985 6575,4985 6600,4960 J19.2@6600,4910
IO3: J19.3 M1.D43 | length 4690.4
  Top Layer w4.7: v1(4460,2270) 4460,2275 4460.59,2275.59 M1.D43@4586.61,2275.59
  Bottom Layer w4.7: v1(4460,2270) 4320,2270 4200,2390 4200,3845 4555,4200 5590,4200 6155,4765 6445,4765 6500,4820 J19.3@6500,4910
IO4: J19.4 M1.D53 | length 4762.2
  Top Layer w4.7: v1(4460,2180) 4462.83,2177.17 M1.D53@4586.61,2177.17
  Bottom Layer w4.7: v1(4460,2180) 4260,2180 4160,2280 4160,3865 4535,4240 5580,4240 6145,4805 6355,4805 6400,4850 J19.4@6400,4910
JTAG-TCK: J17.5 M1.A13 | length 2058.6
  Top Layer w4.7: v1(2205,3655) 2206.46,3653.54 M1.A13@2326.77,3653.54
  Bottom Layer w4.7: J17.5@1040,4930 1040,4795 1095,4740 1315,4740 1335,4720 1335,4505 1970,3870 1970,3805 2120,3655 v1(2205,3655)
JTAG-TDI: J17.3 M1.A9 | length 2139.4
  Top Layer w4.7: J17.3@940,4930 1005,4865 v1(1345,4865) ; v1(2205,3695) 2207.09,3692.91 M1.A9@2326.77,3692.91
  Bottom Layer w4.7: v1(1345,4865) 1350,4860 1350,4515 1985,3880 1985,3815 2105,3695 v1(2205,3695)
JTAG-TDO: J17.6 M1.A7 | length 2101.9
  Top Layer w4.7: J17.6@1040,5030 1090,4980 1300,4980 1360,4920 v1(1360,4890) ; v1(2205,3720) 2212.4,3712.6 M1.A7@2326.77,3712.6
  Bottom Layer w4.7: v1(1360,4890) 1365,4890 1365,4525 2000,3890 2000,3825 2105,3720 v1(2205,3720)
JTAG-TMS: J17.4 M1.A1 | length 2246.5
  Top Layer w4.7: v1(2205,3775) 2208.35,3771.65 M1.A1@2326.77,3771.65
  Bottom Layer w4.7: J17.4@940,5030 995,5085 1290,5085 1350,5025 1350,4975 1395,4930 1395,4545 2030,3910 2030,3845 2100,3775 v1(2205,3775)
JTAG-TRST: J17.2 M1.A3 | length 2284.3
  Top Layer w4.7: v1(2205,3750) 2206.97,3751.97 M1.A3@2326.77,3751.97
  Bottom Layer w4.7: J17.2@840,5030 890,4980 1325,4980 1380,4925 1380,4535 2015,3900 2015,3835 2100,3750 v1(2205,3750)
LCD-3V3: C47.1 C57.1 C58.1 C63.1 C65.1 C67.1 J4.6 L8.1 L9.1 M2.2 M2.3 R65.2 R73.1 R75.1 R77.1 R79.1 R81.1 R82.2 R84.1 U12.2 U12.3 U13.3 U13.6 U13.7 U14.4 U16.1 | length 1219.4
  Top Layer w10: C67.1@1560,4790.13 v2(1560,4835) 1582.91,4857.91 J4.6@1582.91,4900.28 ; v1(1650,4715) R82.2@1650,4750.13 ; v1(3020,4715) R81.1@3020,4749.87 ; v1(3110,4715) R84.1@3110,4749.87
  Top Layer w12: v1(2415,4715) R73.1@2415,4749.87 ; C47.1@4817.47,4980.71 4817.47,4957.53 4830,4945 4830,4890 4820,4880 ; v1(4860,4510) R65.2@4860,4545.13
  Bottom Layer w10: v1(1650,4715) 1650,4775
  Bottom Layer w15: v2(1560,4835) 1620,4775 1650,4775 v2(2290,4775)
  other v1: 4115,4655 4145,4655 4180,4670 4210,4670 4240,4670 4365,4730 4395,4730 4365,4755 4395,4755 4425,4755 2335,4795 2335,4820 2375,4830 2400,4845
  other v2: 3140,4315 3185,4315 3230,4315 3275,4315 3320,4315 3365,4315 3410,4315 3430,4340 3430,4380 3430,4420 4690,4715 4730,4715 4690,4750 4730,4750 4690,4785 4730,4785 4690,4820 4730,4820 4690,4855 4730,4855
LCD-BL-PWM: M1.A23 R71.1 U16.2 | length 1630.9
  Top Layer w4.7: M1.A23@2326.77,3555.12 2365.12,3555.12 2400,3590 v1(2400,3595) ; R71.1@3070,4574.87 3070,4555 3060,4545 3060,4475 3070,4465 3104.37,4465 U16.2@3105,4464.37 3105.63,4465 v1(3145,4465)
  Bottom Layer w4.7: v1(2400,3595) 2380,3615 2380,3640 2390,3650 2420,3650 2455,3685 2455,4000 2920,4465 v1(3145,4465)
LCD-PWR-EN: M1.A19 R64.2 U12.5 | length 3761
  Top Layer w4.7: M1.A19@2326.77,3594.49 2374.49,3594.49 v1(2400,3620) ; v1(4860,4875) 4897.48,4875 U12.5@4898.11,4875.63 4934.37,4875.63 4940,4870 R64.2@4970.13,4870
  Bottom Layer w4.7: v1(2400,3620) 2410,3620 2470,3680 2470,3990 2880,4400 3310,4400 3385,4475 3575,4475 3680,4370 4845,4370 4895,4420 4895,4840 v1(4860,4875)
LCD-RST: J4.1 M2.5 R65.1 U14.2 | length 3920.3
  Top Layer w4.7: J4.1@1681.34,4900.28 1681.34,4863.66 1715,4830 v1(1750,4830) ; v1(2440,4835) 2440,4845 2449.88,4854.88 M2.5@2449.88,4899.37 ; v1(2840,4670) v1(2840,4710) ; U14.2@4857,4660 4857,4618 v1(4860,4615) R65.1@4860,4585.13
  Bottom Layer w4.7: v1(1750,4830) 1800,4880 2415,4880 2440,4855 v1(2440,4835) 2440,4805 2535,4710 v1(2840,4710) ; v1(2840,4670) 3125,4670 3195,4600 3610,4600 3645,4565 3645,4430 3690,4385 4770,4385 4820,4435 4820,4595 4840,4615 v1(4860,4615)
LED-WWAN: D20.2 J13.42 | length 1238.2
  Top Layer w4.7: D20.2@195,425 610,425 695,340 875,340 915,380 1245,380 1269.21,404.21 J13.42@1269.21,506.42
LICELL: BT1.1 M1.D19 | length 1176
  Top Layer w10: v1(4525,2510) 4526.81,2511.81 M1.D19@4586.61,2511.81 ; v1(5475,2460) BT1.1@5612.91,2460 BT1.1@5617.91,2460
  Bottom Layer w10: v1(4525,2510) 5425,2510 v1(5475,2460)
LR: M2.33 R77.2 R78.2 | length 163.2
  Top Layer w4.7: v1(3000,4835) 3001.06,4836.06 M2.33@3001.06,4899.37
  Bottom Layer w4.7: R78.2@2975,4789.87 R77.2@3020,4789.87 3000,4809.87 v1(3000,4835)
LVDS0-CLK_N: M1.A33 M2.17 | length 2525.7
  Top Layer w3.8: v1(2175,3433.9) 2167.9,3441 2076.27,3441 2020,3497.27 1996,3521.27 1996,4018.73 2226.27,4249 2409,4249 2430.4,4270.4 2430.4,4275.92 2429.04,4277.28 2429.04,4290.26 2437.85,4299.06 2450.82,4299.06 2462.79,4287.09 2468.31,4287.09 2471.84,4290.62 2471.84,4296.15 2459.87,4308.11 2459.87,4321.09 2468.68,4329.89 2481.65,4329.89 2493.62,4317.92 2499.14,4317.92 2502.67,4321.45 2502.67,4326.98 2490.7,4338.94 2490.7,4351.92 2499.51,4360.72 2512.48,4360.72 2524.45,4348.75 2529.97,4348.75 2533.5,4352.28 2533.5,4357.81 2521.53,4369.77 2521.53,4382.75 2530.34,4391.55 2543.31,4391.55 2555.28,4379.58 2560.8,4379.58 2564.33,4383.11 2564.33,4388.64 2552.36,4400.6 2552.36,4413.58 2561.17,4422.38 2574.14,4422.38 2586.11,4410.41 2591.63,4410.41 2595.16,4413.94 2595.16,4419.47 2583.19,4431.43 2583.19,4444.41 2592,4453.21 2604.97,4453.21 2616.94,4441.24 2622.46,4441.24 2625.99,4444.77 2625.99,4450.3 2614.02,4462.26 2614.02,4475.24 2622.83,4484.04 2635.8,4484.04 2647.77,4472.07 2653.29,4472.07 2656.82,4475.6 2656.82,4481.13 2644.85,4493.09 2644.85,4506.07 2653.66,4514.87 2666.63,4514.87 2667.99,4513.51 2673.51,4513.51 2690,4530 2690,4867.98 2686.1,4871.88 M2.17@2686.1,4899.37 ; v1(2232.1,3475) 2230,3475 2225,3470 2225,3465 2238.65,3451.35 2288.03,3451.35 2293.38,3456.69 M1.A33@2326.77,3456.69
  Bottom Layer w3.8: v1(2175,3433.9) 2175,3436 2180,3441 2214.73,3441 2225,3451.27 2225,3467.9 v1(2232.1,3475)
LVDS0-CLK_P: M1.A35 M2.18 | length 2512
  Top Layer w3.8: v1(2175,3457.1) 2167.9,3450 2080,3450 2026.36,3503.64 2005,3525 2005,4015 2230,4240 2412.73,4240 2439.4,4266.67 2439.4,4279.65 2438.04,4281.01 2438.04,4286.53 2441.57,4290.06 2447.09,4290.06 2459.06,4278.09 2472.04,4278.09 2480.84,4286.9 2480.84,4299.87 2468.87,4311.84 2468.87,4317.36 2472.4,4320.89 2477.92,4320.89 2489.89,4308.92 2502.87,4308.92 2511.67,4317.73 2511.67,4330.7 2499.7,4342.67 2499.7,4348.19 2503.23,4351.72 2508.75,4351.72 2520.72,4339.75 2533.7,4339.75 2542.5,4348.56 2542.5,4361.53 2530.53,4373.5 2530.53,4379.02 2534.06,4382.55 2539.58,4382.55 2551.55,4370.58 2564.53,4370.58 2573.33,4379.39 2573.33,4392.36 2561.36,4404.33 2561.36,4409.85 2564.89,4413.38 2570.41,4413.38 2582.38,4401.41 2595.36,4401.41 2604.16,4410.22 2604.16,4423.19 2592.19,4435.16 2592.19,4440.68 2595.72,4444.21 2601.24,4444.21 2613.21,4432.24 2626.19,4432.24 2634.99,4441.05 2634.99,4454.02 2623.02,4465.99 2623.02,4471.51 2626.55,4475.04 2632.07,4475.04 2644.04,4463.07 2657.02,4463.07 2665.82,4471.88 2665.82,4484.85 2653.85,4496.82 2653.85,4502.34 2657.38,4505.87 2662.9,4505.87 2664.26,4504.51 2677.24,4504.51 2699,4526.27 2699,4865.09 2705.79,4871.88 M2.18@2705.79,4899.37 ; v1(2208.9,3475) 2211,3475 2216,3470 2216,3461.27 2234.92,3442.35 2288.03,3442.35 2293.38,3437.01 M1.A35@2326.77,3437.01
  Bottom Layer w3.8: v1(2175,3457.1) 2175,3455 2180,3450 2211,3450 2216,3455 2216,3467.9 v1(2208.9,3475)
LVDS0-TX0_N: M1.A51 M2.8 | length 2521.3
  Top Layer w3.8: v1(2175,3253.9) 2167.9,3261 1946.27,3261 1821,3386.27 1821,4093.73 2132.27,4405 2235,4405 2329.28,4499.28 2329.28,4513.42 2338.93,4523.07 2353.18,4523.07 2356.8,4519.45 2363.59,4519.45 2367.97,4523.83 2367.97,4530.62 2364.35,4534.24 2364.35,4548.49 2374,4558.14 2388.25,4558.14 2391.87,4554.52 2398.66,4554.52 2403.04,4558.9 2403.04,4573.04 2514.28,4684.28 2514.28,4866.54 2508.94,4871.88 M2.8@2508.94,4899.37 ; v1(2232.1,3295) 2230,3295 2225,3290 2225,3285 2235.82,3274.18 2288.03,3274.18 2293.38,3279.53 M1.A51@2326.77,3279.53
  Bottom Layer w3.8: v1(2175,3253.9) 2175,3256 2180,3261 2214.73,3261 2225,3271.27 2225,3287.9 v1(2232.1,3295)
LVDS0-TX0_P: M1.A53 M2.9 | length 2506.4
  Top Layer w3.8: v1(2175,3277.1) 2167.9,3270 1950,3270 1830,3390 1830,4090 2136,4396 2238.73,4396 2338.28,4495.55 2338.28,4509.69 2342.65,4514.07 2349.45,4514.07 2353.07,4510.45 2367.32,4510.45 2376.97,4520.1 2376.97,4534.35 2373.35,4537.97 2373.35,4544.76 2377.73,4549.14 2384.52,4549.14 2388.14,4545.52 2402.39,4545.52 2412.04,4555.17 2412.04,4569.31 2523.28,4680.55 2523.28,4866.54 2528.62,4871.88 M2.9@2528.62,4899.37 ; v1(2208.9,3295) 2211,3295 2216,3290 2216,3281.27 2232.09,3265.18 2288.03,3265.18 2293.38,3259.84 M1.A53@2326.77,3259.84
  Bottom Layer w3.8: v1(2175,3277.1) 2175,3275 2180,3270 2211,3270 2216,3275 2216,3287.9 v1(2208.9,3295)
LVDS0-TX1_N: M1.A45 M2.11 | length 2523.8
  Top Layer w3.8: v1(2175,3308.9) 2167.9,3316 2001.27,3316 1881,3436.27 1881,4068.73 2162.27,4350 2290,4350 2343.13,4403.13 2343.13,4408.65 2341.77,4410.01 2341.77,4422.98 2350.57,4431.79 2363.55,4431.79 2375.51,4419.82 2381.04,4419.82 2384.57,4423.35 2384.57,4428.87 2372.6,4440.84 2372.6,4453.81 2381.4,4462.62 2394.38,4462.62 2406.34,4450.65 2411.87,4450.65 2415.4,4454.18 2415.4,4459.7 2403.43,4471.67 2403.43,4484.64 2412.23,4493.45 2425.21,4493.45 2437.17,4481.48 2442.7,4481.48 2446.23,4485.01 2446.23,4490.53 2444.87,4491.89 2444.87,4504.87 2573.33,4633.33 2573.33,4672.98 2563.33,4682.98 2563.33,4696.62 2573.41,4706.7 2578.53,4706.7 2583.33,4711.5 2583.33,4717.7 2573.33,4727.7 2573.33,4866.54 2567.99,4871.88 M2.11@2567.99,4899.37 ; v1(2232.1,3350) 2230,3350 2225,3345 2225,3343.24 2235,3333.24 2288.03,3333.24 2293.38,3338.58 M1.A45@2326.77,3338.58
  Bottom Layer w3.8: v1(2175,3308.9) 2175,3311 2180,3316 2214.73,3316 2225,3326.27 2225,3342.9 v1(2232.1,3350)
LVDS0-TX1_P: M1.A47 M2.12 | length 2508.8
  Top Layer w3.8: v1(2175,3332.1) 2167.9,3325 2005,3325 1890,3440 1890,4065 2166,4341 2293.73,4341 2352.13,4399.4 2352.13,4412.38 2350.77,4413.74 2350.77,4419.26 2354.3,4422.79 2359.82,4422.79 2371.79,4410.82 2384.76,4410.82 2393.57,4419.62 2393.57,4432.6 2381.6,4444.57 2381.6,4450.09 2385.13,4453.62 2390.65,4453.62 2402.62,4441.65 2415.59,4441.65 2424.4,4450.45 2424.4,4463.43 2412.43,4475.4 2412.43,4480.92 2415.96,4484.45 2421.48,4484.45 2433.45,4472.48 2446.42,4472.48 2455.23,4481.28 2455.23,4494.26 2453.87,4495.62 2453.87,4501.14 2582.33,4629.61 2582.33,4676.7 2572.33,4686.7 2572.33,4692.9 2577.14,4697.7 2582.26,4697.7 2592.33,4707.78 2592.33,4721.42 2582.33,4731.42 2582.33,4866.54 2587.68,4871.88 M2.12@2587.68,4899.37 ; v1(2208.9,3350) 2211,3350 2216,3345 2216,3339.51 2231.27,3324.24 2288.03,3324.24 2293.38,3318.9 M1.A47@2326.77,3318.9
  Bottom Layer w3.8: v1(2175,3332.1) 2175,3330 2180,3325 2211,3325 2216,3330 2216,3342.9 v1(2208.9,3350)
LVDS0-TX2_N: M1.A39 M2.14 | length 2515.2
  Top Layer w3.8: v1(2175,3373.9) 2167.9,3381 2036.27,3381 1936,3481.27 1936,4038.73 2197.27,4300 2355,4300 2383.13,4328.13 2383.13,4333.65 2381.77,4335.01 2381.77,4347.98 2390.57,4356.79 2403.55,4356.79 2415.51,4344.82 2421.04,4344.82 2424.57,4348.35 2424.57,4353.87 2412.6,4365.84 2412.6,4378.81 2421.4,4387.62 2434.38,4387.62 2446.34,4375.65 2451.87,4375.65 2455.4,4379.18 2455.4,4384.7 2443.43,4396.67 2443.43,4409.64 2452.23,4418.45 2465.21,4418.45 2477.17,4406.48 2482.7,4406.48 2486.23,4410.01 2486.23,4415.53 2474.26,4427.5 2474.26,4440.47 2483.06,4449.28 2496.04,4449.28 2508,4437.31 2513.53,4437.31 2517.06,4440.84 2517.06,4446.36 2515.7,4447.72 2515.7,4460.7 2632.39,4577.39 2632.39,4600.58 2622.39,4610.58 2622.39,4623.02 2631.57,4632.2 2638.49,4632.2 2642.39,4636.1 2642.39,4641.1 2638.49,4645 2631.57,4645 2622.39,4654.18 2622.39,4666.62 2631.57,4675.8 2638.49,4675.8 2642.39,4679.7 2642.39,4684.7 2632.39,4694.7 2632.39,4866.54 2627.05,4871.88 M2.14@2627.05,4899.37 ; v1(2232.1,3420) 2230,3420 2225,3415 2225,3407.29 2240,3392.29 2288.03,3392.29 2293.38,3397.64 M1.A39@2326.77,3397.64
  Bottom Layer w3.8: v1(2175,3373.9) 2175,3376 2180,3381 2209.73,3381 2225,3396.27 2225,3412.9 v1(2232.1,3420)
LVDS0-TX2_P: M1.A41 M2.15 | length 2500.3
  Top Layer w3.8: v1(2175,3397.1) 2167.9,3390 2040,3390 1945,3485 1945,4035 2201,4291 2358.73,4291 2392.13,4324.4 2392.13,4337.38 2390.77,4338.74 2390.77,4344.26 2394.3,4347.79 2399.82,4347.79 2411.79,4335.82 2424.76,4335.82 2433.57,4344.62 2433.57,4357.6 2421.6,4369.57 2421.6,4375.09 2425.13,4378.62 2430.65,4378.62 2442.62,4366.65 2455.59,4366.65 2464.4,4375.45 2464.4,4388.43 2452.43,4400.4 2452.43,4405.92 2455.96,4409.45 2461.48,4409.45 2473.45,4397.48 2486.42,4397.48 2495.23,4406.28 2495.23,4419.26 2483.26,4431.23 2483.26,4436.75 2486.79,4440.28 2492.31,4440.28 2504.28,4428.31 2517.25,4428.31 2526.06,4437.11 2526.06,4450.09 2524.7,4451.45 2524.7,4456.97 2641.39,4573.66 2641.39,4604.3 2631.39,4614.3 2631.39,4619.3 2635.29,4623.2 2642.21,4623.2 2651.39,4632.38 2651.39,4644.82 2642.21,4654 2635.29,4654 2631.39,4657.9 2631.39,4662.9 2635.29,4666.8 2642.21,4666.8 2651.39,4675.98 2651.39,4688.42 2641.39,4698.42 2641.39,4866.54 2646.73,4871.88 M2.15@2646.73,4899.37 ; v1(2208.9,3420) 2211,3420 2216,3415 2216,3403.57 2236.27,3383.29 2288.03,3383.29 2293.38,3377.95 M1.A41@2326.77,3377.95
  Bottom Layer w3.8: v1(2175,3397.1) 2175,3395 2180,3390 2206,3390 2216,3400 2216,3412.9 v1(2208.9,3420)
LVDS0-TX3_N: M1.A27 M2.20 | length 2522.6
  Top Layer w3.8: v1(2175,3493.9) 2167.9,3501 2106.27,3501 2046,3561.27 2046,3993.73 2256.27,4204 2469,4204 2485.4,4220.4 2485.4,4225.92 2484.04,4227.28 2484.04,4240.26 2492.85,4249.06 2505.82,4249.06 2517.79,4237.09 2523.31,4237.09 2526.84,4240.62 2526.84,4246.15 2514.87,4258.11 2514.87,4271.09 2523.68,4279.89 2536.65,4279.89 2548.62,4267.92 2554.14,4267.92 2557.67,4271.45 2557.67,4276.98 2545.7,4288.94 2545.7,4301.92 2554.51,4310.72 2567.48,4310.72 2579.45,4298.75 2584.97,4298.75 2588.5,4302.28 2588.5,4307.81 2576.53,4319.77 2576.53,4332.75 2585.34,4341.55 2598.31,4341.55 2610.28,4329.58 2615.8,4329.58 2619.33,4333.11 2619.33,4338.64 2607.36,4350.6 2607.36,4363.58 2616.17,4372.38 2629.14,4372.38 2641.11,4360.41 2646.63,4360.41 2650.16,4363.94 2650.16,4369.47 2638.19,4381.43 2638.19,4394.41 2647,4403.21 2659.97,4403.21 2671.94,4391.24 2677.46,4391.24 2680.99,4394.77 2680.99,4400.3 2669.02,4412.26 2669.02,4425.24 2677.83,4434.04 2690.8,4434.04 2702.77,4422.07 2708.29,4422.07 2711.82,4425.6 2711.82,4431.13 2699.85,4443.09 2699.85,4456.07 2708.66,4464.87 2721.63,4464.87 2722.99,4463.51 2728.51,4463.51 2750,4485 2750,4515.58 2740,4525.58 2740,4538.02 2749.18,4547.2 2756.1,4547.2 2760,4551.1 2760,4556.1 2756.1,4560 2749.18,4560 2740,4569.18 2740,4581.62 2749.18,4590.8 2756.1,4590.8 2760,4594.7 2760,4599.7 2756.1,4603.6 2749.18,4603.6 2740,4612.78 2740,4625.22 2749.18,4634.4 2756.1,4634.4 2760,4638.3 2760,4643.3 2750,4653.3 2750,4867.04 2745.16,4871.88 M2.20@2745.16,4899.37 ; v1(2232.1,3535) 2230,3535 2225,3530 2225,3520.4 2235,3510.4 2288.03,3510.4 2293.38,3515.75 M1.A27@2326.77,3515.75
  Bottom Layer w3.8: v1(2175,3493.9) 2175,3496 2180,3501 2214.73,3501 2225,3511.27 2225,3527.9 v1(2232.1,3535)
LVDS0-TX3_P: M1.A29 M2.21 | length 2508.1
  Top Layer w3.8: v1(2175,3517.1) 2167.9,3510 2110,3510 2055,3565 2055,3990 2260,4195 2472.73,4195 2494.4,4216.67 2494.4,4229.65 2493.04,4231.01 2493.04,4236.53 2496.57,4240.06 2502.09,4240.06 2514.06,4228.09 2527.04,4228.09 2535.84,4236.9 2535.84,4249.87 2523.87,4261.84 2523.87,4267.36 2527.4,4270.89 2532.92,4270.89 2544.89,4258.92 2557.87,4258.92 2566.67,4267.73 2566.67,4280.7 2554.7,4292.67 2554.7,4298.19 2558.23,4301.72 2563.75,4301.72 2575.72,4289.75 2588.7,4289.75 2597.5,4298.56 2597.5,4311.53 2585.53,4323.5 2585.53,4329.02 2589.06,4332.55 2594.58,4332.55 2606.55,4320.58 2619.53,4320.58 2628.33,4329.39 2628.33,4342.36 2616.36,4354.33 2616.36,4359.85 2619.89,4363.38 2625.41,4363.38 2637.38,4351.41 2650.36,4351.41 2659.16,4360.22 2659.16,4373.19 2647.19,4385.16 2647.19,4390.68 2650.72,4394.21 2656.24,4394.21 2668.21,4382.24 2681.19,4382.24 2689.99,4391.05 2689.99,4404.02 2678.02,4415.99 2678.02,4421.51 2681.55,4425.04 2687.07,4425.04 2699.04,4413.07 2712.02,4413.07 2720.82,4421.88 2720.82,4434.85 2708.85,4446.82 2708.85,4452.34 2712.38,4455.87 2717.9,4455.87 2719.26,4454.51 2732.24,4454.51 2759,4481.27 2759,4519.3 2749,4529.3 2749,4534.3 2752.9,4538.2 2759.82,4538.2 2769,4547.38 2769,4559.82 2759.82,4569 2752.9,4569 2749,4572.9 2749,4577.9 2752.9,4581.8 2759.82,4581.8 2769,4590.98 2769,4603.42 2759.82,4612.6 2752.9,4612.6 2749,4616.5 2749,4621.5 2752.9,4625.4 2759.82,4625.4 2769,4634.58 2769,4647.02 2759,4657.02 2759,4866.04 2764.84,4871.88 M2.21@2764.84,4899.37 ; v1(2208.9,3535) 2211,3535 2216,3530 2216,3516.68 2231.27,3501.4 2288.03,3501.4 2293.38,3496.06 M1.A29@2326.77,3496.06
  Bottom Layer w3.8: v1(2175,3517.1) 2175,3515 2180,3510 2211,3510 2216,3515 2216,3527.9 v1(2208.9,3535)
MIC-AUD: C142.2 C185.2 U21.6 | length 1861.6
  Top Layer w4.7: v1(1740,755) 1751.26,743.74 U21.6@1751.26,720 ; C142.2@2230,994.87 v1(2230,1030)
  Bottom Layer w4.7: C185.2@764.87,430.13 815.13,430.13 895,510 1590,510 1700,620 1700,690 1740,730 v1(1740,755) 1740,785 1765,810 1885,810 2055,980 2180,980 v1(2230,1030)
MIC-DET: M1.B25 R189.1 R190.1 | length 174.6
  Top Layer w4.7: R189.1@2203.29,2632.99 R190.1@2203.29,2589.69 2245.31,2589.69 2264.13,2570.87 M1.B25@2326.77,2570.87
MICBIAS: R115.2 R116.2 U21.13 | length 150.1
  Top Layer w4.7: U21.13@1814.26,599.92 1814.26,580.74 1835,560 R116.2@1835,519.87 1854.87,500 1860.13,500 R115.2@1880,480.13
MICIN: C130.2 J8.1 R116.1 | length 529.5
  Top Layer w4.7: C130.2@1655,480.13 1655,435 1670,420 1835,420 ; J8.1@1815,190 1815,285 1835,305 1835,420 ; R116.1@1835,479.87 1835,420
MX6-ONOFF: M1.D20 Q5.1 | length 2885.7
  Top Layer w4.7: M1.D20@4720.47,2511.81 4828.19,2511.81 4865,2475 v1(4905,2475)
  Bottom Layer w4.7: v1(4905,2475) 5040,2475 5125,2390 5635,2390 6140,1885 6140,805 6113.93,778.93 6026.85,778.93 Q5.1@6024.99,780.79
NetC3_1: C3.1 D3.2 L1.1 U3.3 | length 67.9
  Top Layer w12: 6909.45,2062.99 6921.26,2051.18 U3.3@6972.44,2051.18
  other v2: 6653.54,2082.68 6728.35,2082.68 6767.72,2082.68 6807.09,2082.68 6653.54,2118.11 6653.54,2153.54 6653.54,2188.98 6653.54,2224.41 6653.54,2259.84 6728.35,2267.72 6767.72,2267.72 6807.09,2267.72